# Altium PCB PCB2.PcbDoc
Units mm, origin at the board's own origin, x right, y up, seen from the top; angles counter-clockwise.
Board outline 85.47 x 58.17 mm, 2 copper layers (Top Layer, Bottom Layer); 23 components, 21 nets, 60 pads, 0 vias.
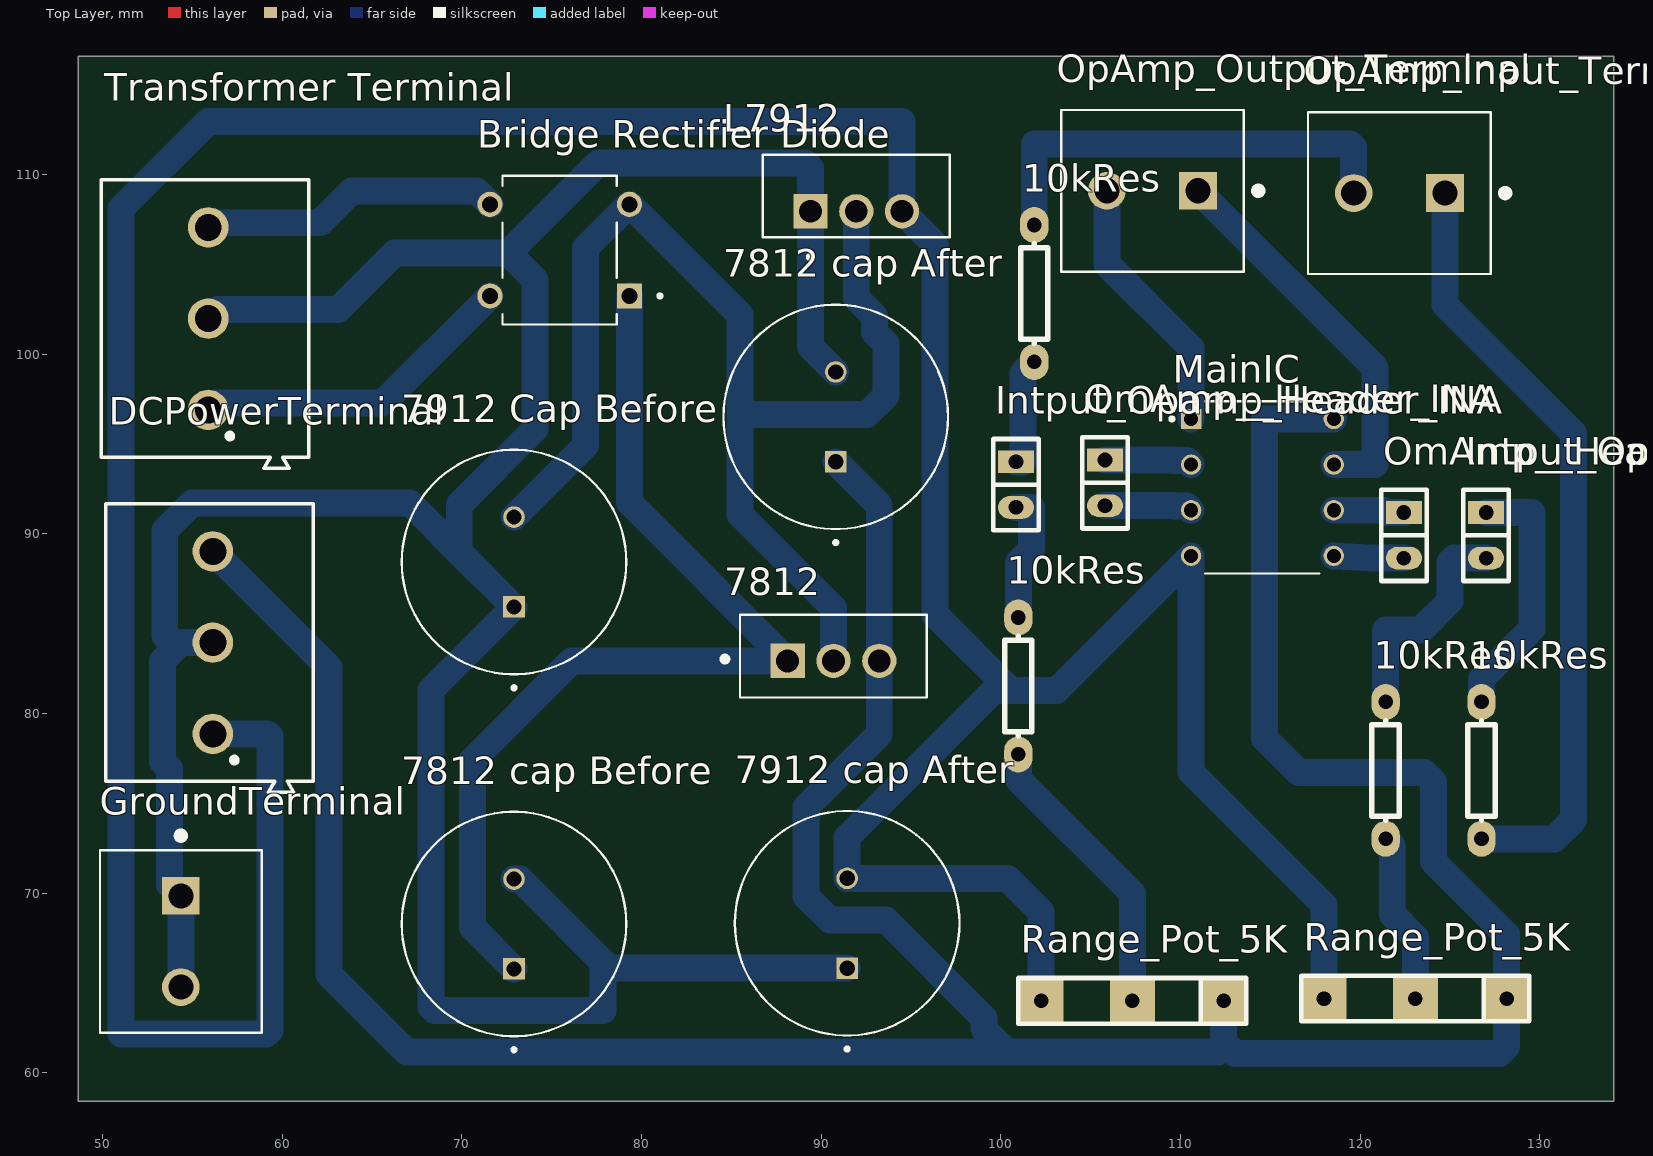
[diagram p0: Top Layer view]
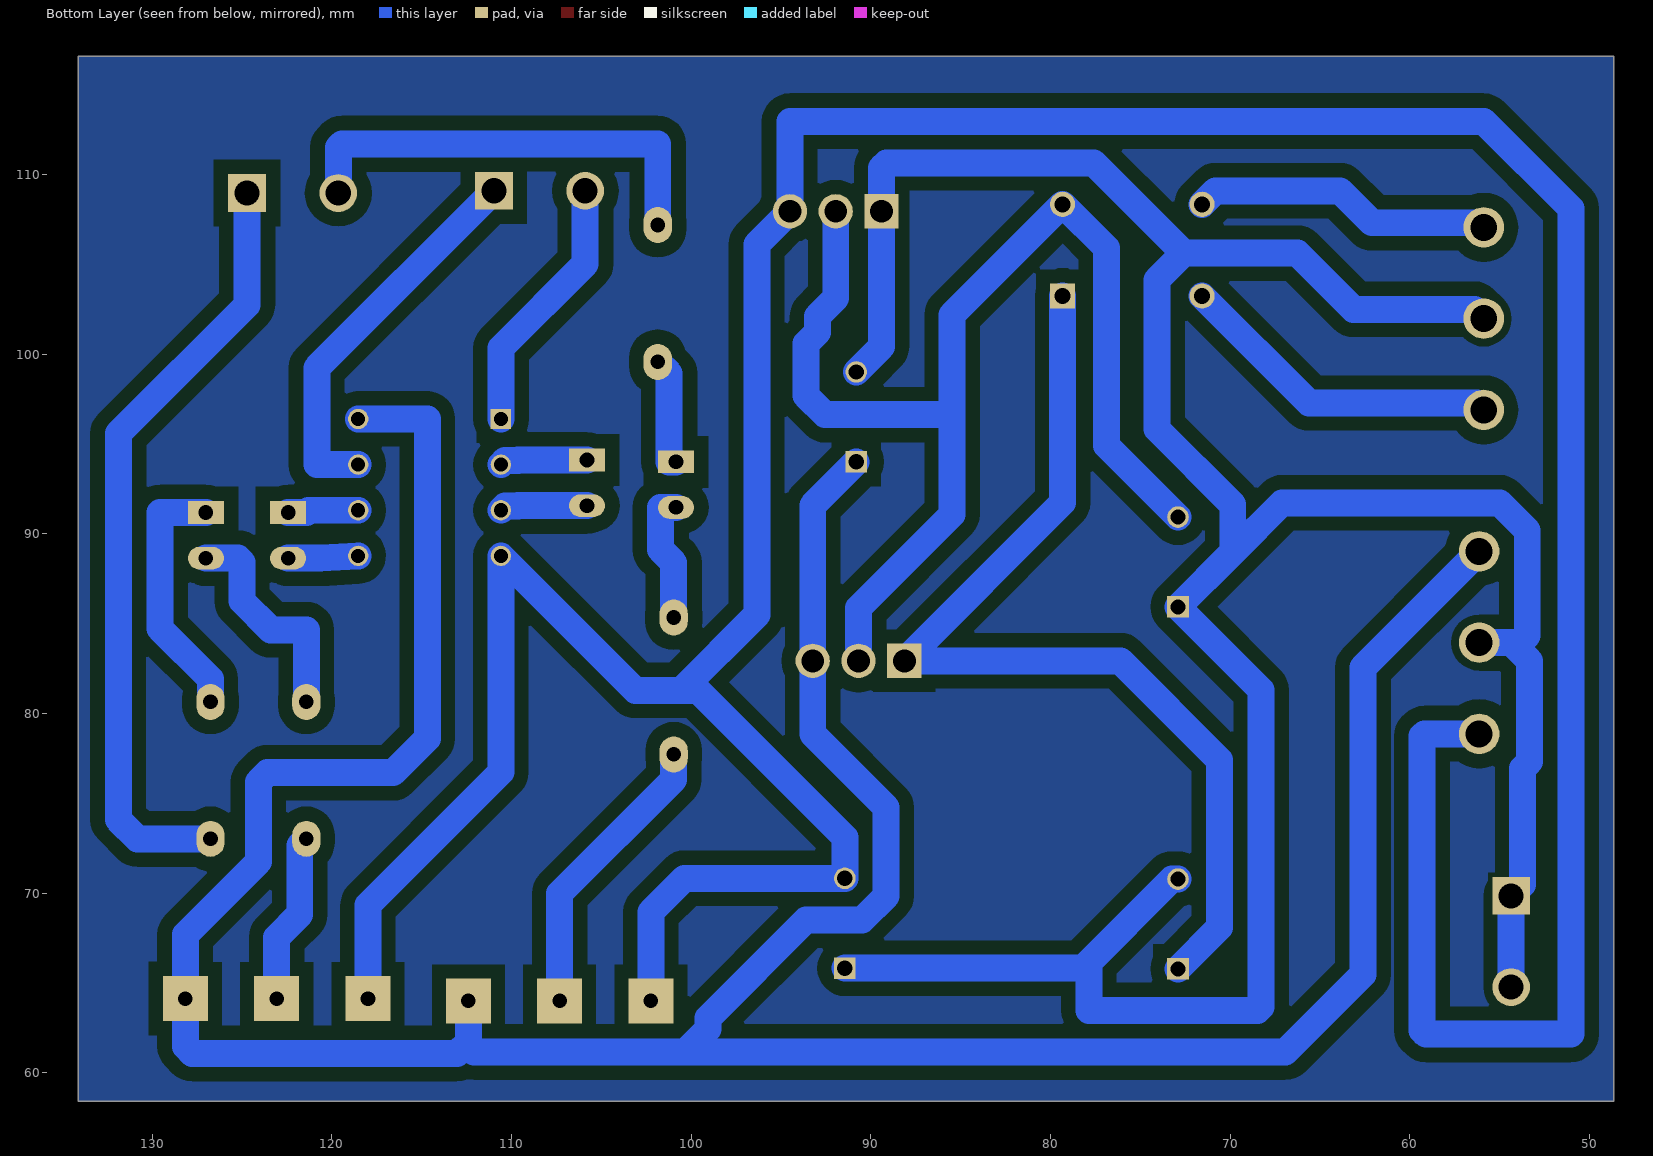
[diagram p1: Bottom Layer view, seen from below]
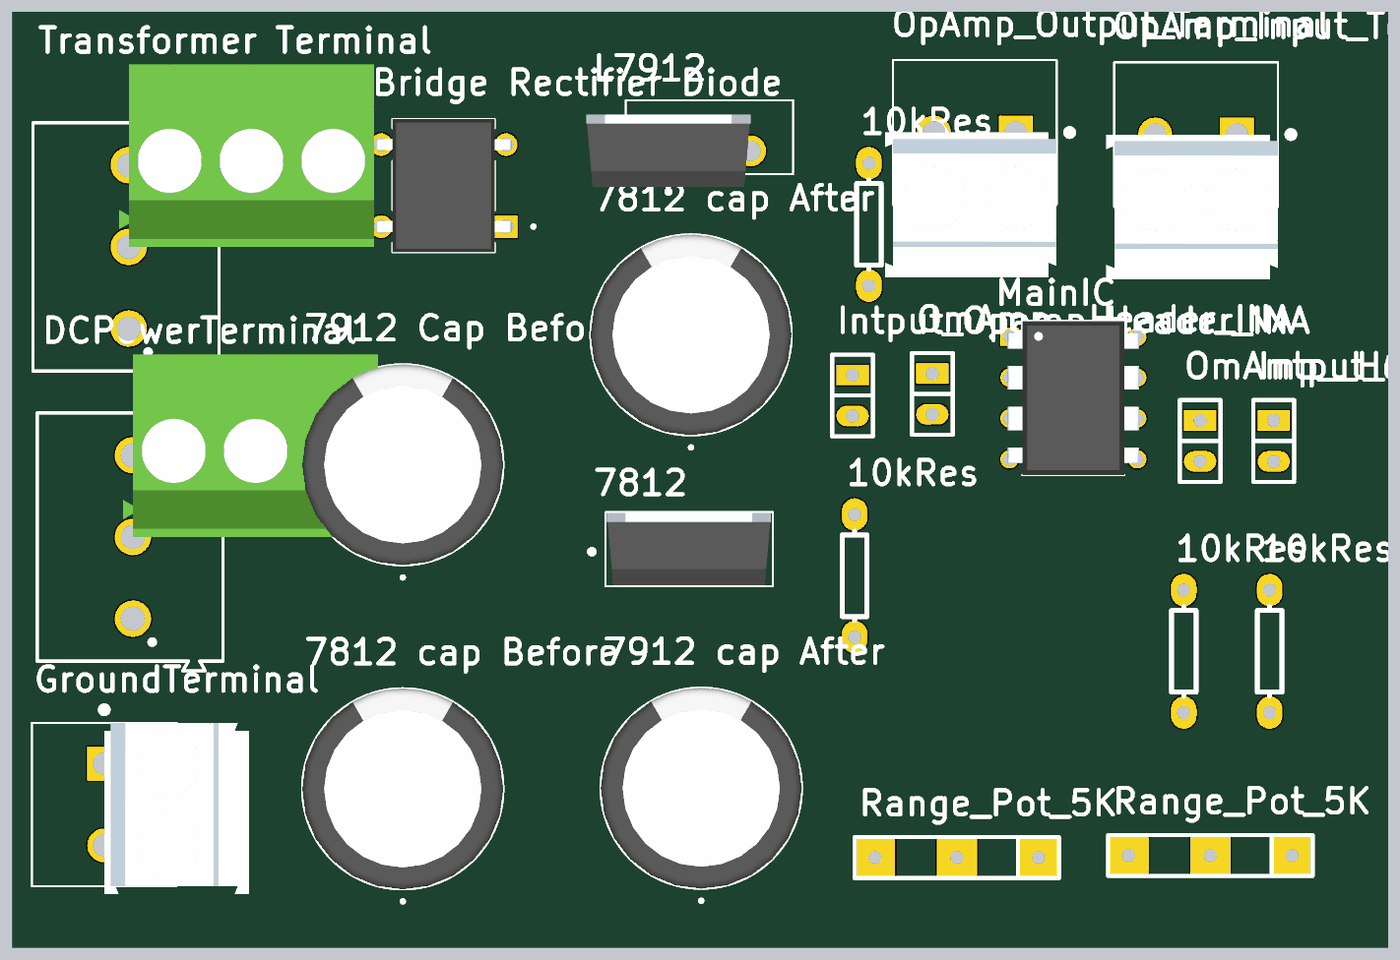
[diagram p2: 3D render of the assembled board from above, using the file's embedded part models]

## Layer stack, top to bottom
Top Solder: solder mask 0.0102, Solder Resist, Dk 3.5
Top Layer: signal copper 0.0356
Dielectric 1: dielectric 0.32, FR-4, Dk 4.8
Bottom Layer: signal copper 0.0356
Bottom Solder: solder mask 0.0102, Solder Resist, Dk 3.5

## Board outline
48.641,58.42 48.641,116.586 134.112,116.586 134.112,58.42

## Design rules (kind name [scope] priority, off if disabled: settings)
Clearance [All] p1: gap=0.8 ignorepadtopadclearanceinfootprint=FALSE
PolygonConnect [All] p1: connectstyle=Relief reliefconductorwidth=0.254 reliefentries=4 polygonreliefangle="90 Angle" airgapwidth=0.254
RoutingCorners [All] p1: cornerstyle=90-Degree minsetback=2.54 maxsetback=2.54
RoutingLayers [All] p1: top layer_v5=FALSE bottom layer_v5=TRUE
RoutingVias [All] p1: holewidth=0.711 width=2 viastyle="Through Hole" minholewidth=0.711 minwidth=2 maxholewidth=0.711 maxwidth=2
SolderMaskExpansion [All] p1: expansion=0.102
Width [All] p1: maxlimit=1.5 minlimit=1.5 preferedwidth=1.5
28 further rules are at their usual default settings.

## Classes and differential pairs
component class Sheet1: 10kRes 7812 "7812 cap After" "7812 cap Before" "7912 cap After" "7912 Cap Before" "Bridge Rectifier Diode" DCPowerTerminal GroundTerminal Intput_Opamp_Header_INA Intput_Opamp_Header_INB L7912 MainIC OmAmp__Header_INA OmAmp__Header_INB OpAmp_Input_Terminal OpAmp_Output_Terminal Range_Pot_5K "Transformer Terminal"

## Components (designator, comment, footprint, x,y, rotation, side; value= is the part's Value field where it differs from the comment)
10kRes "" AXIAL0.3 101.854,107.188 r270 top
10kRes "RES1" AXIAL0.3 121.412,73.025 r90 top
10kRes "RES1" AXIAL0.3 126.746,73.025 r90 top
10kRes "" AXIAL0.3 100.965,77.724 r90 top
7812 "L7812CV" TO-220-3 90.678,83.191 r0 top
"7812 cap After" "470uf/50v" CAPPRD500W60D1250H2000 90.805,96.51 r90 top
"7812 cap Before" "470uf/50v" CAPPRD500W60D1250H2000 72.898,68.286 r90 top
"7912 cap After" "470uf/50v" CAPPRD500W60D1250H2000 91.44,68.326 r90 top
"7912 Cap Before" "470uf/50v" CAPPRD500W60D1250H2000 72.898,88.431 r90 top
"Bridge Rectifier Diode" "DB102-BP" DIP776W48P510L828H480Q4 75.438,105.791 r180 top
DCPowerTerminal "TB KF127 3pins 5mm 300v 10A" 691236510003 56.134,83.947 r90 top
GroundTerminal "TB KF127 2pins 5mm 300v 10A" TE_282841-2 54.356,67.31 r270 top
Intput_Opamp_Header_INA "Pin Header 2.54 Straight black" SIP2 100.838,94.01 r270 top
Intput_Opamp_Header_INB "Pin Header 2.54 Straight black" SIP2 127,91.186 r270 top
L7912 "L7915CV" TO255P1040X460X1935-3 89.398,107.95 r0 top
MainIC "TL082CP" DIP794W45P254L959H508Q8 114.554,92.583 r0 top
OmAmp__Header_INA "Pin Header 2.54 Straight black" SIP2 105.791,94.107 r270 top
OmAmp__Header_INB "Pin Header 2.54 Straight black" SIP2 122.428,91.186 r270 top
OpAmp_Input_Terminal "TB KF127 2pins 5mm 300v 10A" TE_282841-2 122.174,108.966 r180 top
OpAmp_Output_Terminal "691101710002" TE_282841-2 108.434,109.093 r180 top
Range_Pot_5K "POTENTIOMETER" POT 128.143,64.135 r180 top
Range_Pot_5K "" POT 112.395,64.008 r180 top
"Transformer Terminal" "TB KF127 3pins 5mm 300v 10A" 691236510003 55.88,101.981 r90 top

## Footprints (in the part's own frame and the unit in brackets; to place one, negate y for a bottom-side part, rotate by r counter-clockwise, add the part's x,y. Pads: shape width x height; smd on the part's side, far side on the other; paste and mask are expansions set on the pad)
691236510003 [mm]
  round 2.25 hole 1.5: 1(-5.08,0) 2(0,0) 3(5.08,0)
  silkscreen extent -8.32,-5.6 7.72,5.95, body extent 0,-15.24 11.35,0.6, height 18
AXIAL0.3 [mil]
  oval 78.74x62 hole 32: 1(0,0) 2(300,0)
  silkscreen extent 41,-30 259,30
CAPPRD500W60D1250H2000 [mm]
  round 1.2 hole 0.85: N(2.5,0)
  rect 1.2x1.2 hole 0.85: P(-2.5,0)
  silkscreen extent -7.1,-6.25 6.25,6.25, body extent -6.25,-6.25 6.25,6.25, height 20
DIP776W48P510L828H480Q4 [mm]
  rect 1.398x1.398 hole 0.89: 1(-3.882,2.55)
  round 1.398 hole 0.89: 2(-3.882,-2.55) 3(3.882,-2.55) 4(3.882,2.55)
  silkscreen extent -5.68,-4.14 3.18,4.14, body extent -4.2,-4.14 4.2,4.14, height 3.3
DIP794W45P254L959H508Q8 [mm]
  rect 1.13x1.13 hole 0.78: 1(-3.97,3.81)
  round 1.13 hole 0.78: 2(-3.97,1.27) 3(-3.97,-1.27) 4(-3.97,-3.81) 5(3.97,-3.81) 6(3.97,-1.27) 7(3.97,1.27) 8(3.97,3.81)
  silkscreen extent -5.13,-4.8 3.17,4.8, body extent -4.1,-4.79 4.1,4.79, height 5.08
POT [mm]
  rect 2.5x2.5 hole 0.813: 1(0,0) 2(5.08,0) 3(10.16,0)
  silkscreen extent -1.27,-1.27 11.43,1.27
SIP2 [mm]
  rect 1.27x2 hole 0.813: 1(0,0)
  oval 1.27x2 hole 0.813: 2(2.54,0)
  silkscreen extent -1.27,-1.27 3.81,1.27
TE_282841-2 [mm]
  rect 2.1x2.1 hole 1.4: 1(-2.54,0)
  round 2.1 hole 1.4: 2(2.54,0)
  silkscreen extent -6.09,-4.5 5.08,4.5, body extent -5.08,0 5.58,9, height 15.2
TO255P1040X460X1935-3 [mm]
  rect 1.91x1.91 hole 1.27: 1(0,0)
  round 1.91 hole 1.27: 2(2.55,0) 3(5.1,0)
  silkscreen extent -2.65,-2.64 7.75,3.15, body extent -5.1,-2.25 5.1,2.25, height 19.68
TO-220-3 [mm]
  rect 1.91x1.91 hole 1.27: 1(-2.55,-0.26)
  round 1.91 hole 1.27: 2(0,-0.26) 3(2.55,-0.26)
  silkscreen extent -6.19,-2.3 5.2,2.3, body extent -5.1,-2.25 5.1,2.25, height 19.68

## Part data
10kRes 10kRes: library part RES1
7812: "IC REG LINEAR 12V 1.5A TO220AB", Package=None, Availability=Unavailable, MF="{'manufacturer': u'STMicroelectronics'}", MP=L7812CV, Price=None
"7812 cap After" "7812 cap Before" "7912 cap After" "7912 Cap Before": library part EEUTP1V471, "TP-A", Package=None, Availability=Unavailable, MF="{'manufacturer': u'Panasonic'}", MP=EEUTP1V471, Price=None
"Bridge Rectifier Diode" MainIC: Package=None, Availability=Unavailable, Price=None
  "Bridge Rectifier Diode": MF="{'manufacturer': u'Micro Commercial Components'}", MP=DB102-BP
  MainIC: MF="{'manufacturer': u'Texas Instruments'}", MP=TL082CP
DCPowerTerminal "Transformer Terminal": library part 691101710003, "WR-TBL Series 101 Horizontal Entry Modular, THT, pitch 5mm, 3p", Manufacturer="Wurth Elektronik", Operating Temperature Max=105°C, Operating Temperature Min=-40°C, Rated Current=16A, Working Voltage=250V, Application="Pressure Clamp", Category="Terminal Blocks", ComponentLink1Description="Website Link", ComponentLink1URL=https://www.we-online.com/redexpert/article/691101710003?ad, ComponentLink2Description="Datasheet Link", ComponentLink2URL=https://www.we-online.com/redexpert/spec/691101710003?ad, Manufacturer Part Number=691101710003, Match Code=WR-TBL, Modularity=Yes, Mount="Through Hole", Number of Pins=3, Number of Rows=1, Orientation=Horizontal, Packaging=Box, Pitch=5mm
GroundTerminal OpAmp_Input_Terminal: library part 691101710002, "WR-TBL Series 101 Horizontal Entry Modular, THT, pitch 5mm, 2p", Manufacturer="Wurth Elektronik", Operating Temperature Max=105°C, Operating Temperature Min=-40°C, Rated Current=16A, Working Voltage=250V, Application="Pressure Clamp", Category="Terminal Blocks", ComponentLink1Description="Website Link", ComponentLink1URL=https://www.we-online.com/redexpert/article/691101710002?ad, ComponentLink2Description="Datasheet Link", ComponentLink2URL=https://www.we-online.com/redexpert/spec/691101710002?ad, Manufacturer Part Number=691101710002, Match Code=WR-TBL, Modularity=Yes, Mount="Through Hole", Number of Pins=2, Number of Rows=1, Orientation=Horizontal, Packaging=Box, Pitch=5mm
Intput_Opamp_Header_INA Intput_Opamp_Header_INB OmAmp__Header_INA OmAmp__Header_INB: library part "HEADER 2"
L7912: "L7915 Series -15 V 1.5 A Fixed Ouput Negative Voltage Regulator - TO-220", Package=None, Availability=Unavailable, MF="{'manufacturer': u'STMicroelectronics'}", MP=L7915CV, Price=None
OpAmp_Output_Terminal: "WR-TBL Series 101 Horizontal Entry Modular, THT, pitch 5mm, 2p", Manufacturer="Wurth Elektronik", Operating Temperature Max=105°C, Operating Temperature Min=-40°C, Rated Current=16A, Working Voltage=250V, Application="Pressure Clamp", Category="Terminal Blocks", ComponentLink1Description="Website Link", ComponentLink1URL=https://www.we-online.com/redexpert/article/691101710002?ad, ComponentLink2Description="Datasheet Link", ComponentLink2URL=https://www.we-online.com/redexpert/spec/691101710002?ad, Manufacturer Part Number=691101710002, Match Code=WR-TBL, Modularity=Yes, Mount="Through Hole", Number of Pins=2, Number of Rows=1, Orientation=Horizontal, Packaging=Box, Pitch=5mm
Range_Pot_5K: "Potentiometer"
Range_Pot_5K: library part POTENTIOMETER, "Potentiometer"

## Nets (pads, with @x,y where several pads share a name; then routed paths per layer and width w, separated by ;. In a path a pad name is that pad's centre, name@x,y a point inside that pad or via, vN(x,y) a via of type N, cw(c..) or ccw(c..) an arc to the next point about the centre after c; other vN are vias at no path point)
10kRes_Header_INA: 10kRes.2@101.854,99.568 Intput_Opamp_Header_INA.1 | length 6.2
  Bottom Layer w1.5: Intput_Opamp_Header_INA.1 101.219,94.01 101.219,98.933 10kRes.2@101.854,99.568
10kRes_Header_INB: 10kRes.2@126.746,80.645 Intput_Opamp_Header_INB.1 | length 14.3
  Bottom Layer w1.5: 10kRes.2@126.746,80.645 126.746,81.915 129.55,84.719 129.55,91.186 Intput_Opamp_Header_INB.1
+12: 7812.3 "7812 cap After.P" DCPowerTerminal.3 MainIC.8 Range_Pot_5K.1 | length 187.1
  Bottom Layer w1.5: DCPowerTerminal.3 62.611,82.55 62.611,65.481 66.929,61.163 100.33,61.163 ; 90.805,94.01 93.228,91.587 7812.3 93.228,78.855 89.14,74.767 89.14,69.85 90.486,68.504 93.599,68.504 99.06,63.043 99.06,62.433 100.33,61.163 ; Range_Pot_5K.1@112.395,64.008 112.395,61.722 ; MainIC.8 114.681,96.393 114.681,78.613 116.586,76.708 123.571,76.708 124.079,76.2 124.079,71.755 128.143,67.691 128.143,64.135 128.143,61.468 127.762,61.087 113.03,61.087 112.395,61.722 ; 100.33,61.163 112.09,61.163 112.395,61.468 112.395,61.722
-12: "7912 cap After.N" DCPowerTerminal.1 L7912.3 MainIC.4 Range_Pot_5K.3 | length 225.7
  Bottom Layer w1.5: DCPowerTerminal.1 59.182,78.867 59.309,78.74 59.309,62.357 59.106,62.154 51.029,62.154 51.029,108.102 55.88,112.954 94.498,112.954 L7912.3 96.342,106.106 96.342,85.496 100.559,81.28 ; Range_Pot_5K.3@102.235,64.008 102.235,68.961 100.37,70.826 91.44,70.826 91.44,73.101 99.619,81.28 100.559,81.28 ; Range_Pot_5K.3@117.983,64.135 117.983,69.342 110.584,76.741 MainIC.4 103.091,81.28 100.559,81.28
"AC 12": "Bridge Rectifier Diode.3" "Transformer Terminal.3" | length 16.8
  Bottom Layer w1.5: 55.88,107.061 56.134,107.315 62.103,107.315 63.881,109.093 70.804,109.093 71.556,108.341
AC_0: "7812 cap After.N" "7812 cap Before.N" "7912 cap After.P" "7912 Cap Before.P" "Transformer Terminal.2" DCPowerTerminal.2 GroundTerminal.1 GroundTerminal.2 L7912.1 | length 176.1
  Bottom Layer w1.5: GroundTerminal.2 GroundTerminal.1 53.721,70.485 53.721,76.939 53.34,77.32 53.34,82.931 54.356,83.947 ; 55.88,101.981 56.388,102.489 63.119,102.489 66.258,105.628 72.574,105.628 ; DCPowerTerminal.2 54.356,83.947 ; 72.898,70.786 73.232,70.786 78.192,65.826 91.44,65.826 ; 77.858,65.826 77.858,63.475 68.478,63.475 68.275,63.678 68.275,81.308 72.898,85.931 69.85,88.979 ; 90.805,99.01 89.398,100.417 L7912.1 89.398,110.373 89.129,110.642 77.588,110.642 72.574,105.628 ; 54.356,83.947 53.848,83.947 53.459,84.336 53.459,90.187 54.991,91.719 67.11,91.719 69.85,88.979 ; 69.85,88.979 69.85,91.621 74.061,95.832 74.061,104.14 72.574,105.628
AC_12_N: "Bridge Rectifier Diode.4" "Transformer Terminal.1" | length 18.3
  Bottom Layer w1.5: 55.88,96.901 56.261,97.282 65.597,97.282 71.556,103.241
Bridge_xx12_Negative: 7812.2 "7912 Cap Before.N" "Bridge Rectifier Diode.2" L7912.2 | length 69.7
  Bottom Layer w1.5: 72.898,90.931 76.886,94.919 76.886,105.906 79.32,108.341 85.471,102.19 85.471,96.636 ; 7812.2 90.678,85.877 85.471,91.084 85.471,96.636 ; L7912.2 91.948,103.124 92.964,102.108 92.964,101.219 93.599,100.584 93.599,97.688 92.546,96.636 85.471,96.636
Bridge_xx12_Positve: 7812.1 "7812 cap Before.P" "Bridge Rectifier Diode.1" | length 56.4
  Bottom Layer w1.5: 72.898,65.786 70.598,68.086 70.598,77.419 76.11,82.931 7812.1 79.32,91.739 79.32,103.241
Header_+INA: MainIC.3 OmAmp__Header_INA.2 | length 4.9
  Bottom Layer w1.5: OmAmp__Header_INA.2 109.617,91.567 109.631,91.553 110.344,91.553 MainIC.3
Header_+INB: MainIC.5 OmAmp__Header_INB.2 | length 3.9
  Bottom Layer w1.5: MainIC.5 120.625,88.646 OmAmp__Header_INB.2
Header_-INA: MainIC.2 OmAmp__Header_INA.1 | length 4.9
  Bottom Layer w1.5: OmAmp__Header_INA.1 109.617,94.107 109.631,94.093 110.344,94.093 MainIC.2
Header_-INB: MainIC.6 OmAmp__Header_INB.1 | length 4
  Bottom Layer w1.5: MainIC.6 120.498,91.313 121.285,91.313 121.412,91.186 OmAmp__Header_INB.1
INA_Header_10kRes: 10kRes.2@100.965,85.344 Intput_Opamp_Header_INA.2 | length 7.3
  Bottom Layer w1.5: Intput_Opamp_Header_INA.2 101.689,91.47 101.689,89.116 100.965,88.392 10kRes.2@100.965,85.344
INB_Header_10kRes: 10kRes.2@121.412,80.645 Intput_Opamp_Header_INB.2 | length 12.5
  Bottom Layer w1.5: 10kRes.2@121.412,80.645 121.412,84.658 123.393,84.658 124.993,86.258 124.993,88.417 125.222,88.646 Intput_Opamp_Header_INB.2
Input_10kRes_Terminal_INA: 10kRes.1@101.854,107.188 OpAmp_Input_Terminal.2 | length 24.9
  Bottom Layer w1.5: 10kRes.1@101.854,107.188 101.854,111.709 119.431,111.709 119.634,111.506 OpAmp_Input_Terminal.2
Input_10kRes_Terminal_INB: 10kRes.1@126.746,73.025 OpAmp_Input_Terminal.1 | length 43.4
  Bottom Layer w1.5: OpAmp_Input_Terminal.1 124.714,102.743 131.877,95.58 131.877,74.092 130.81,73.025 10kRes.1@126.746,73.025
OpAmp_Output_Termina_1: MainIC.1 OpAmp_Output_Terminal.2 | length 14.6
  Bottom Layer w1.5: OpAmp_Output_Terminal.2 105.894,105.029 110.584,100.339 MainIC.1
OpAmp_Output_Termina_2: MainIC.7 OpAmp_Output_Terminal.1 | length 21.6
  Bottom Layer w1.5: OpAmp_Output_Terminal.1 120.828,99.239 120.828,93.853 MainIC.7
Pot_10KRes_INA: 10kRes.1@100.965,77.724 Range_Pot_5K.2@107.315,64.008 | length 16.3
  Bottom Layer w1.5: 10kRes.1@100.965,77.724 100.965,76.327 107.315,69.977 Range_Pot_5K.2@107.315,64.008
Pot_10KRes_INB: 10kRes.1@121.412,73.025 Range_Pot_5K.2@123.063,64.135 | length 9.6
  Bottom Layer w1.5: 10kRes.1@121.412,73.025 121.779,72.658 121.779,68.823 123.063,67.539 Range_Pot_5K.2@123.063,64.135

## Polygon pours and split planes (outlines as drawn)
AC_0 on Bottom Layer "Top Layer-No Net" (solid, pour order 1): 48.641,58.42 48.641,116.586 134.112,116.586 134.112,58.42